# EAGLE board CPW_2016 (EAGLE 7.5.0)
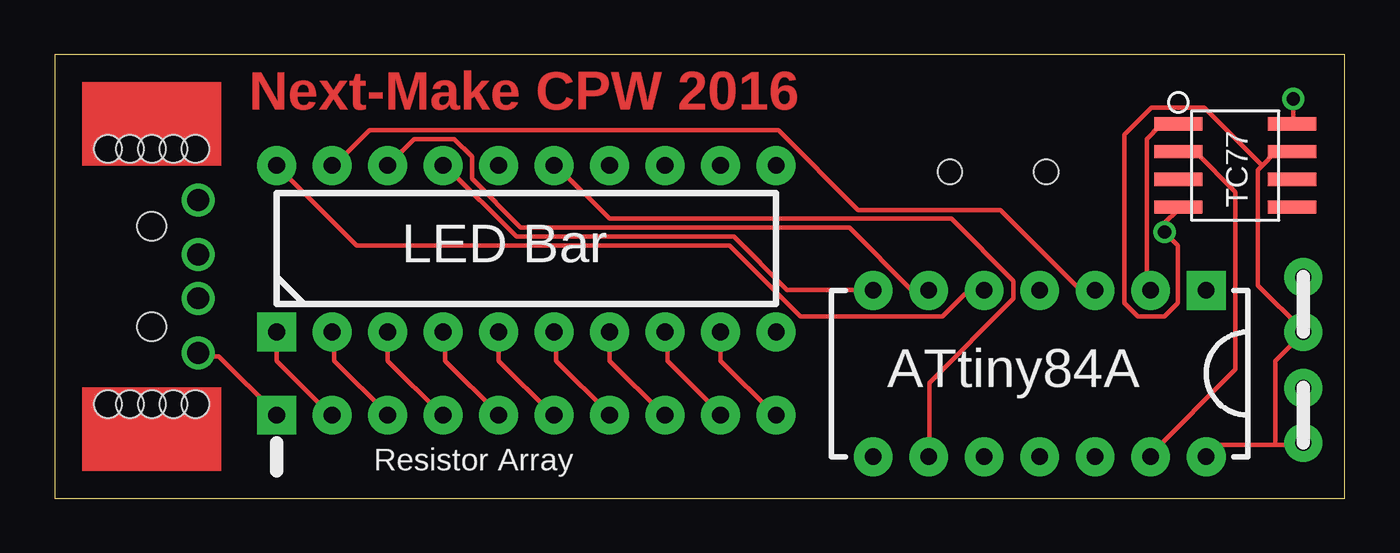
[diagram p0: board, top side]
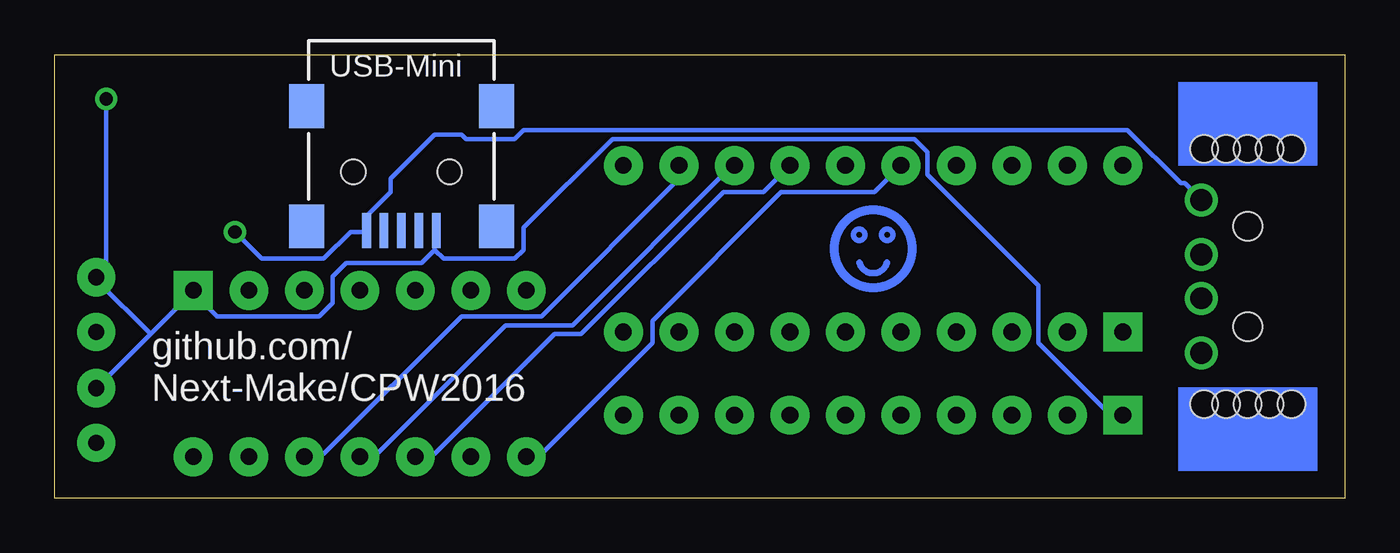
[diagram p1: board, bottom side, seen from below]

Size 59.05 x 20.32 mm. Coordinates in mm from the lower left corner, seen from the top.
Outline: 59.05,20.32 0,20.32 0,0 59.05,0 59.05,20.32
Copper layers (1*16): Top 0.035mm / dielectric 1.5mm / Bottom 0.035mm
Design rules "default *": minimum track width 8mil, minimum drill 24mil, track to track 8mil, track to pad 8mil, pad to pad 8mil, via to via 8mil, smd to smd 8mil, copper to edge 40mil, drill to drill 8mil, minimum pad ring 10mil, minimum via ring 8mil, stop-mask expansion 4mil, vias tented up to drill 25mil, thermal gap 10mil

## Footprints (pad centres in the part's own frame; a part is rotated, then mirrored left to right if it is on the bottom)
SIP-10 = drill 0.762 pad 1.778 square: PIN_1 0,0 | drill 0.762 pad 1.778: PIN_2 0,-2.54; PIN_3 0,-5.08; PIN_4 0,-7.62; PIN_5 0,-10.16; PIN_6 0,-12.7; PIN_7 0,-15.24; PIN_8 0,-17.78; PIN_9 0,-20.32; PIN_10 0,-22.86
CAP_FK18 = drill 0.75 pad 1.75: PIN_1 0,0; PIN_2 2.5,0
PDIP-14 = drill 0.762 pad 1.778 square: PIN_1 0,15.24 | drill 0.762 pad 1.778: PIN_2 0,12.7; PIN_3 0,10.16; PIN_4 0,7.62; PIN_5 0,5.08; PIN_6 0,2.54; PIN_7 0,0; PIN_8 7.62,0; PIN_9 7.62,2.54; PIN_10 7.62,5.08; PIN_11 7.62,7.62; PIN_12 7.62,10.16; PIN_13 7.62,12.7; PIN_14 7.62,15.24
LED_X10_BAR = drill 0.762 pad 1.778 square: PIN_1 0,0 | drill 0.762 pad 1.778: PIN_2 0,-2.54; PIN_3 0,-5.08; PIN_4 0,-7.62; PIN_5 0,-10.16; PIN_6 0,-12.7; PIN_7 0,-15.24; PIN_8 0,-17.78; PIN_9 0,-20.32; PIN_10 0,-22.86; PIN_11 7.62,-22.86; PIN_12 7.62,-20.32; PIN_13 7.62,-17.78; PIN_14 7.62,-15.24; PIN_15 7.62,-12.7; PIN_16 7.62,-10.16; PIN_17 7.62,-7.62; PIN_18 7.62,-5.08; PIN_19 7.62,-2.54; PIN_20 7.62,0
SOIC-8 = smd 2.2 x 0.6: P$1 0,3.81; P$2 0,2.54; P$3 0,1.27; P$4 0,0; P$5 5.2,0; P$6 5.2,1.27; P$7 5.2,2.54; P$8 5.2,3.81
USB_A_TH = drill 1: P$L -1,2.13; P$LL -3.5,2.13; P$R 1,2.13; P$RR 3.5,2.13 | hole 1.3: -2.3,0; 2.3,0 | hole 1.25: -5.85,0; 5.85,0; -5.85,1; -5.85,-1; 5.85,1; 5.85,-1; -5.85,2; -5.85,-2; 5.85,2; 5.85,-2
SMT_MINI_USB = smd 1.6 x 0.4: +5V 8.7,1.6; D+ 8.7,0; D- 8.7,0.8; GND 8.7,-1.6; ID 8.7,-0.8 | smd 2 x 1.6: FOOR_2 8.5,-4.35; FOOT_1 3,-4.35; FOOT_3 8.5,4.35; FOOT_4 3,4.35 | hole 1.1: 6,-2.2; 6,2.2

## Placement (x,y rotation side)
U$1  9X_1K_BUSSED_R  [SIP-10]  10.16,3.81 90 top
U$2  10UF_FK18  [CAP_FK18]  57.15,7.62 90 top
U$3  ATTINY84A  [PDIP-14]  37.47,9.53 270 top
U$4  LED_X10_BAR  [LED_X10_BAR]  10.16,7.62 90 top
U$5  TC77  [SOIC-8]  51.44,13.34 0 top
U$6  10UF_FK18  [CAP_FK18]  57.15,2.54 90 top
U$7  USB_A_TH  [USB_A_TH]  4.45,10.16 270 top
U$8  USB_MINI  [SMT_MINI_USB]  43.18,20.95 270 bottom

## Library data of the parts
U$1-U$4 U$6 = Next_Make_CPW_2015
U$5 U$7 U$8 = Next_Make_CPW_2016

## Nets
5V: U$1.PIN_1 U$2.PIN_2 U$3.PIN_1 U$5.P$8 U$6.PIN_2 U$7.P$RR U$8.+5V
GND: U$2.PIN_1 U$3.PIN_14 U$5.P$4 U$5.P$7 U$6.PIN_1 U$7.P$LL U$8.GND
IO: U$3.PIN_2 U$5.P$1
N$1: U$1.PIN_2 U$4.PIN_1
N$2: U$1.PIN_3 U$4.PIN_2
N$3: U$1.PIN_4 U$4.PIN_3
N$4: U$1.PIN_5 U$4.PIN_4
N$5: U$1.PIN_6 U$4.PIN_5
N$6: U$1.PIN_7 U$4.PIN_6
N$7: U$1.PIN_8 U$4.PIN_7
N$8: U$1.PIN_9 U$4.PIN_8
N$11: U$3.PIN_11 U$4.PIN_13
N$12: U$3.PIN_12 U$4.PIN_12
N$13: U$3.PIN_10 U$4.PIN_14
N$14: U$3.PIN_9 U$4.PIN_15
N$15: U$3.PIN_8 U$4.PIN_16
N$16: U$3.PIN_7 U$4.PIN_17
N$17: U$3.PIN_6 U$4.PIN_18
N$18: U$3.PIN_3 U$4.PIN_19
N$19: U$3.PIN_5 U$4.PIN_20
N$20: U$1.PIN_10 U$4.PIN_9
SCK: U$3.PIN_13 U$5.P$2

## Tracks (layer width: path | path; a pad name or v marks a point on that pad's centre or on a via)
5V  (via drill 0.61)
  Top 0.203: v56.69,18.29 56.69,17.27 U$5.P$8 | U$7.P$RR 6.71,6.5 7.52,6.5 10.16,3.86 U$1.PIN_1
  Bottom 0.203: v56.69,18.29 56.69,10.57 57.1,10.16 U$2.PIN_2 57.1,9.96 54.66,7.52 | 41.66,11.38 41.66,12.19 U$8.+5V | 41.66,11.38 42.27,10.77 45.72,10.77 46.33,10.16 46.33,8.94 46.94,8.33 51.61,8.33 52.63,9.35 U$3.PIN_1 52.83,9.35 54.66,7.52 | 54.66,7.52 57.1,5.08 U$6.PIN_2 | 41.66,11.38 41.25,10.97 38,10.97 37.59,11.38 37.59,12.39 33.53,16.46 19.71,16.46 19.1,15.85 19.1,14.83 14.02,9.75 14.02,7.11 10.77,3.86 10.16,3.86 U$1.PIN_1
GND  (via drill 0.61)
  Top 0.203: 55.88,2.44 53.24,2.44 U$3.PIN_14 | 55.88,2.44 57.1,2.44 U$6.PIN_1 | 55.27,15.24 55.07,15.04 55.07,9.75 57.1,7.72 U$2.PIN_1 57.1,7.52 55.88,6.3 55.88,2.44 | 55.27,15.24 55.88,15.85 56.49,15.85 U$5.P$7 | U$5.P$4 51.41,13.21 50.8,12.6 v50.8,12.19 51.41,11.58 51.41,8.94 50.8,8.33 49.58,8.33 48.97,8.94 48.97,16.66 50.19,17.88 52.63,17.88 55.27,15.24
  Bottom 0.203: v50.8,12.19 49.58,10.97 46.74,10.97 45.52,12.19 44.91,12.19 U$8.GND 44.7,12.39 44.7,13.01 43.69,14.02 43.69,14.63 41.66,16.66 40.44,16.66 40.23,16.46 38,16.46 37.59,16.87 9.96,16.87 7.52,14.43 7.32,14.43 6.71,13.82 U$7.P$LL
IO
  Top 0.203: U$5.P$1 51.41,17.07 50.6,17.07 49.99,16.46 49.99,9.55 U$3.PIN_2
N$1
  Top 0.203: U$4.PIN_1 10.16,6.3 12.6,3.86 U$1.PIN_2
N$2
  Top 0.203: U$4.PIN_2 12.8,7.52 12.8,6.3 15.24,3.86 U$1.PIN_3
N$3
  Top 0.203: U$4.PIN_3 15.24,6.3 17.68,3.86 U$1.PIN_4
N$4
  Top 0.203: U$4.PIN_4 17.88,7.52 17.88,6.3 20.32,3.86 U$1.PIN_5
N$5
  Top 0.203: U$4.PIN_5 20.32,6.3 22.76,3.86 U$1.PIN_6
N$6
  Top 0.203: U$4.PIN_6 22.96,7.52 22.96,6.3 25.4,3.86 U$1.PIN_7
N$7
  Top 0.203: U$4.PIN_7 25.4,6.3 27.84,3.86 U$1.PIN_8
N$8
  Top 0.203: U$4.PIN_8 28.04,7.52 28.04,6.3 30.48,3.86 U$1.PIN_9
N$9
  Bottom 0.305: 22.23,10.79 arc-150 20.95,10.79
N$11
  Bottom 0.203: U$3.PIN_11 44.91,2.03 44.3,2.03 38.41,7.92 35.36,7.92 28.04,15.24 U$4.PIN_13
N$12
  Bottom 0.203: U$4.PIN_12 30.48,14.63 36.78,8.33 40.44,8.33 46.74,2.03 47.55,2.03 U$3.PIN_12
N$13
  Bottom 0.203: U$4.PIN_14 26.62,14.02 28.45,14.02 34.95,7.52 36.17,7.52 41.66,2.03 42.47,2.03 U$3.PIN_10
N$14
  Top 0.203: U$3.PIN_9 40.03,2.03 40.03,5.28 43.89,9.14 43.89,9.96 41.05,12.8 25.4,12.8 22.96,15.24 U$4.PIN_15
N$15
  Bottom 0.203: U$4.PIN_16 21.54,14.02 25.81,14.02 31.7,8.13 31.7,7.11 36.78,2.03 37.39,2.03 U$3.PIN_8
N$16
  Top 0.203: U$3.PIN_7 37.39,9.55 33.53,9.55 31.09,11.99 21.13,11.99 17.88,15.24 U$4.PIN_17
N$17
  Top 0.203: U$4.PIN_18 16.46,16.46 18.29,16.46 19.1,15.65 19.1,14.63 21.34,12.39 36.37,12.39 39.22,9.55 39.83,9.55 U$3.PIN_6
N$18
  Top 0.203: U$3.PIN_3 47.55,9.55 46.94,9.55 43.28,13.21 36.78,13.21 33.12,16.87 14.43,16.87 12.8,15.24 U$4.PIN_19
N$19
  Top 0.203: U$4.PIN_20 13.82,11.58 30.89,11.58 34.14,8.33 40.64,8.33 41.66,9.35 42.47,9.35 U$3.PIN_5
N$20
  Top 0.203: U$4.PIN_9 30.48,6.3 32.92,3.86 U$1.PIN_10
SCK
  Top 0.203: U$5.P$2 51.61,15.85 52.22,15.85 54.05,14.02 54.05,5.89 50.19,2.03 U$3.PIN_13
(copper drawn outside any net)
  shapes: Bottom area x2, Bottom circle x3, Top area x2

## Text on the board
Top: Next-Make CPW 2016
tPlace: TC77 | LED Bar | ATtiny84A | Resistor Array
bPlace: github.com/ / Next-Make/CPW2016
tStop: Next-Make CPW 2016